# Altium PCB Power-PCB-Layout.PcbDoc
Units mil, origin at the board's own origin, x right, y up, seen from the top; angles counter-clockwise.
Board outline 3900 x 1515 mil, 2 copper layers (Top Layer, Bottom Layer), stack 61.811 mil thick; 60 components, 15 nets, 126 pads, 63 vias.
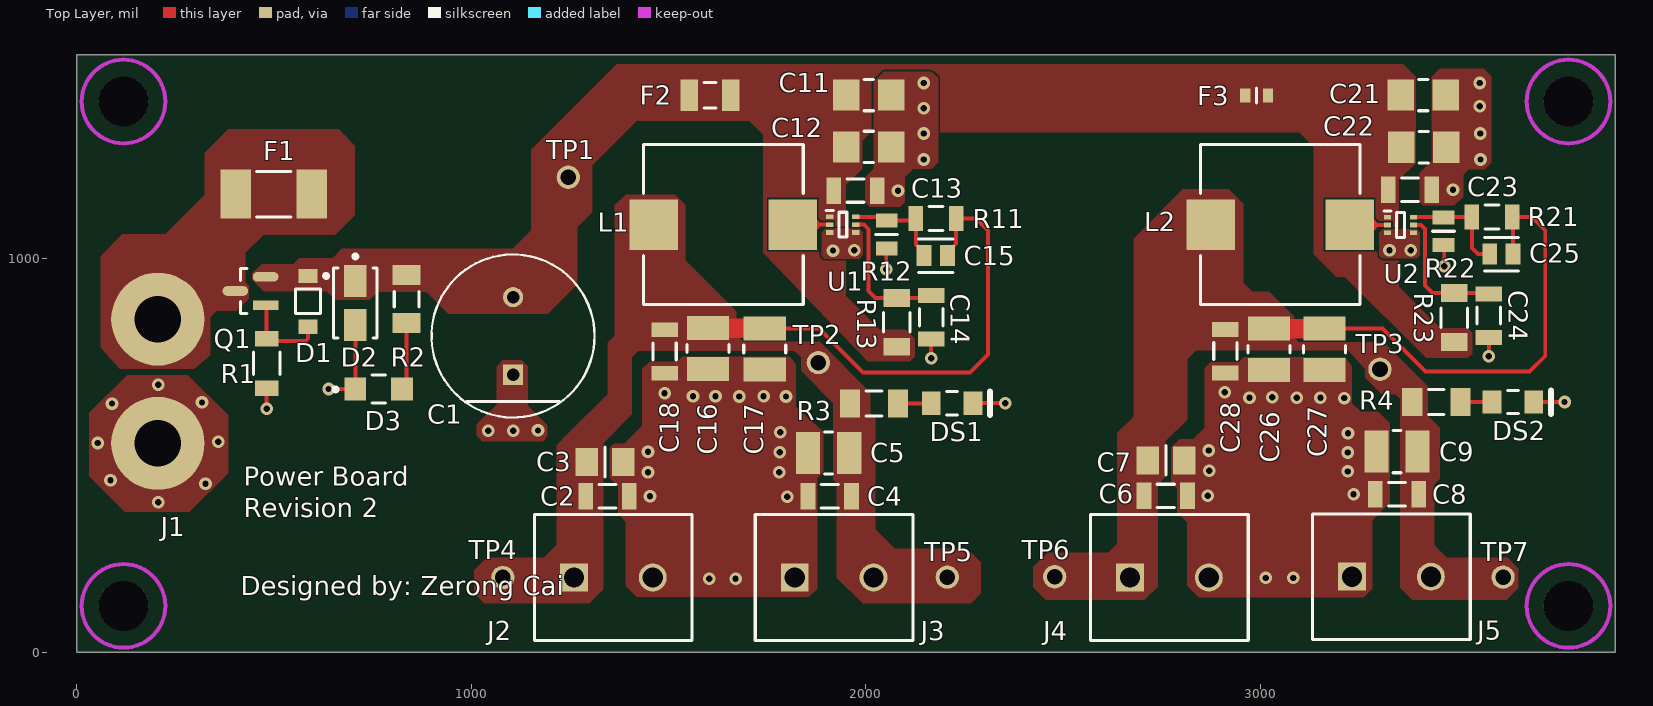
[diagram p0: Top Layer view]
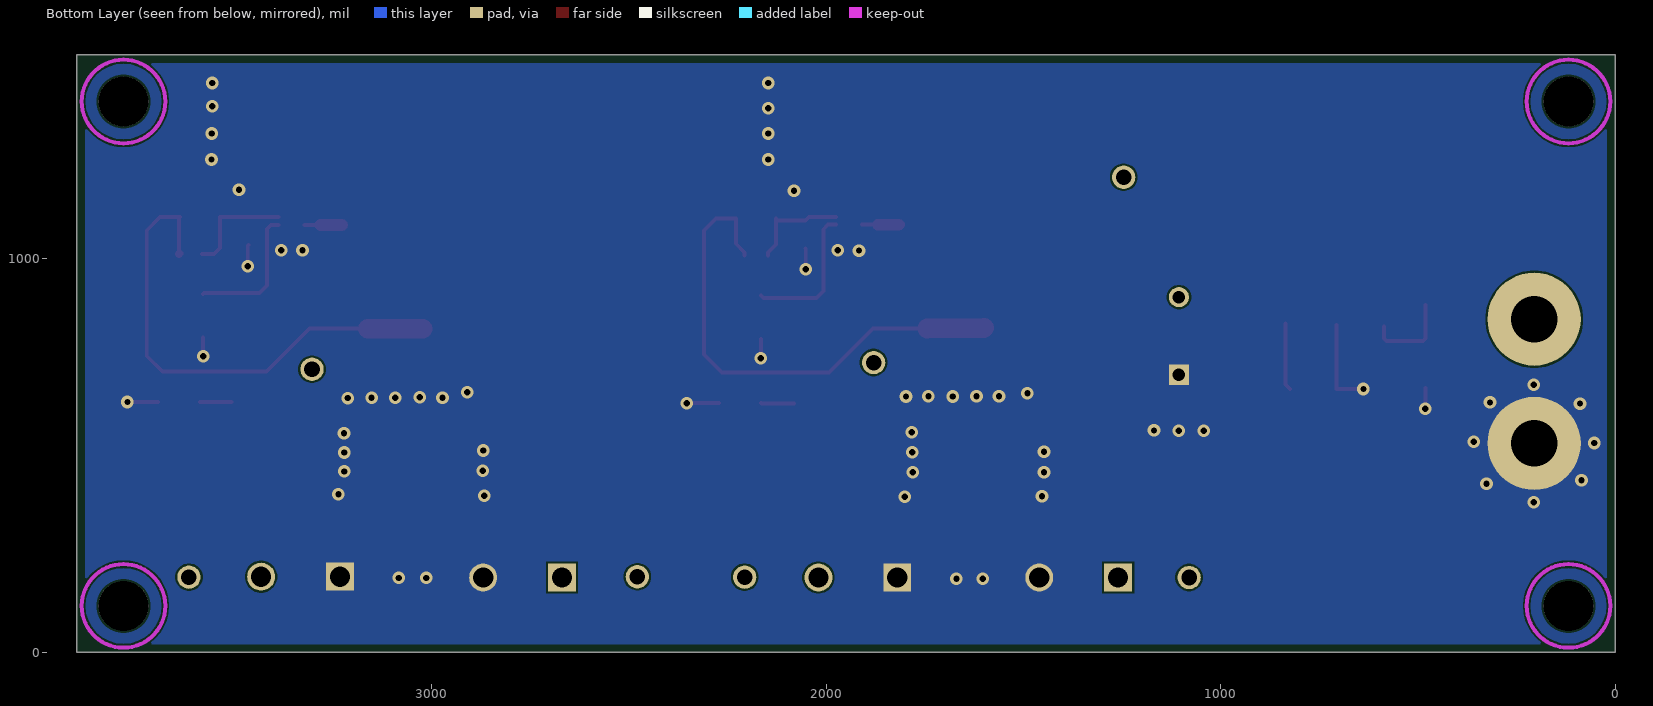
[diagram p1: Bottom Layer view, seen from below]
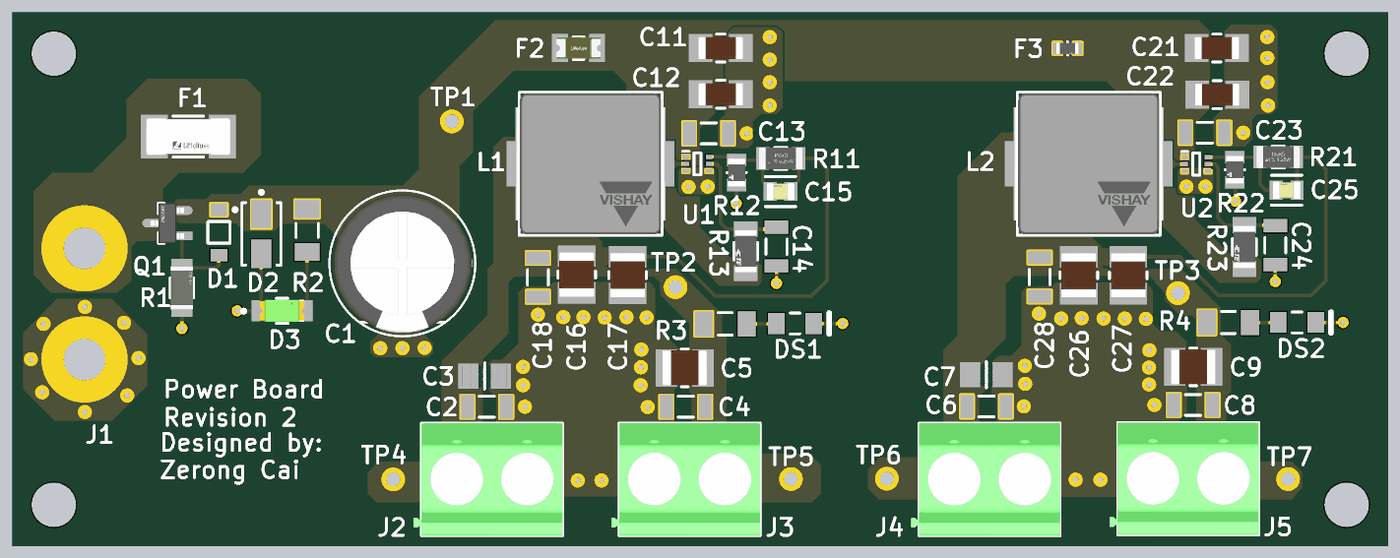
[diagram p2: 3D render of the assembled board from above, using the file's embedded part models]

## Layer stack, top to bottom
Top Solder: solder mask 0.394, Solder Resist, Dk 3.5
Top Layer: signal copper 1.378
Dielectric 1: dielectric 59.055, FR-4, Dk 4.8
Bottom Layer: signal copper 1.378
Bottom Solder: solder mask 0.394, Solder Resist, Dk 3.5

## Board outline
0,0 3900,0 3900,1515 0,1515

## Design rules (kind name [scope] priority, off if disabled: settings)
BoardOutlineClearance [All] p1: gap=20 ignorepadtopadclearanceinfootprint=FALSE except(0: Arc-SplitContinuation Track-SplitContinuation SMDPad-SplitContinuation THPad-SplitContinuation Via-SplitContinuation Fill-SplitContinuation Poly-SplitContinuation Region-SplitContinuation Text-SplitContinuation)
Clearance [All] p1: gap=5 ignorepadtopadclearanceinfootprint=FALSE except(0: Arc-Hole Track-Hole SMDPad-Hole THPad-Hole Via-Hole Fill-Hole Poly-Hole Region-Hole Text-Hole)
HoleSize [All] p1: absolutevalues=TRUE maxlimit=200 minlimit=1 maxpercent=80.000 minpercent=20.000
MinimumSolderMaskSliver [All] p1: minsoldermaskwidth=5
PolygonConnect [All] p1: connectstyle=Direct reliefconductorwidth=10 reliefentries=4 polygonreliefangle="90 Angle" airgapwidth=10
RoutingVias [All] p1: holewidth=12 width=24 viastyle="Through Hole" minholewidth=12 minwidth=24 maxholewidth=16 maxwidth=32
SilkToSolderMaskClearance [IsPad] p1: minsilkscreentomaskgap=5 clearancetoexposedcopper=TRUE
SolderMaskExpansion [All] p1: expansion=4 istentingtop=FALSE
Width [All] p1: maxlimit=100 minlimit=10 preferedwidth=10
27 further rules are at their usual default settings.

## Classes and differential pairs
component class Power: C11 C12 C13 C14 C15 C16 C17 C18 C21 C22 C23 C24 C25 C26 C27 C28 DS1 DS2 F2 F3 L1 L2 R3 R4 R11 R12 R13 R21 R22 R23 TP2 TP3 U1 U2
component class Input-Battery: C1 D1 D2 D3 F1 J1 Q1 R1 R2 TP1
component class Output-Connectors: C2 C3 C4 C5 C6 C7 C8 C9 J2 J3 J4 J5 TP4 TP5 TP6 TP7

## Components (designator, comment, footprint, x,y, rotation, side; value= is the part's Value field where it differs from the comment)
C1 "470u" FP-RAD-TH-D_10_0_5-L_12_5-MFG 1105.75,802.49 r90 top
C2 "100nF" CAPC1206(3216)170_L 1345,396 r180 top
C3 "10uf" FP-GCJ31C-0_3-IPC_C 1339,483 r0 top
C4 "100nF" CAPC1206(3216)170_L 1909,396 r0 top
C5 "47uF" FP-1210-L_3_2_0_3-W_2_5_0-IPC_B 1906,506 r180 top
C6 "100nF" CAPC1206(3216)170_L 2761,397 r180 top
C7 "10uf" FP-GCJ31C-0_3-IPC_C 2761,487 r0 top
C8 "100nF" CAPC1206(3216)170_L 3346.88,401 r0 top
C9 "47uF" FP-1210-L_3_2_0_3-W_2_5_0-IPC_B 3347,509 r180 top
C11 "22uF" FP-1206-L_3_2_0_3-W_1_6_0-IPC_A 2008,1413 r0 top
C12 "22uF" FP-1206-L_3_2_0_3-W_1_6_0-IPC_A 2008,1282 r0 top
C13 "100nF" CAPC1206(3216)170_L 1974,1171 r180 top
C14 "100nF" CAPC1206(3216)170_L 2166,850 r90 top
C15 "100pF" FP-C0805C-DN-MFG 2177.53,1006 r0 top value="100 pF"
C16 "47uF" FP-1210-L_3_2_0_3-W_2_5_0-IPC_B 1600,770.82 r270 top
C17 "47uF" FP-1210-L_3_2_0_3-W_2_5_0-IPC_B 1744,769.18 r270 top
C18 "100nF" CAPC1206(3216)170_L 1490,762.88 r90 top
C21 "22uF" FP-1206-L_3_2_0_3-W_1_6_0-IPC_A 3414,1413 r0 top
C22 "22uF" FP-1206-L_3_2_0_3-W_1_6_0-IPC_A 3415,1281 r0 top
C23 "100nF" CAPC1206(3216)170_L 3380,1173 r180 top
C24 "100nF" CAPC1206(3216)170_L 3580,854 r90 top
C25 "100pF" FP-C0805C-DN-MFG 3612,1010 r0 top value="100 pF"
C26 "47uF" FP-1210-L_3_2_0_3-W_2_5_0-IPC_B 3023,768.82 r270 top
C27 "47uF" FP-1210-L_3_2_0_3-W_2_5_0-IPC_B 3163,768.82 r270 top
C28 "100nF" CAPC1206(3216)170_L 2912,764 r90 top
D1 "MMSZ12T1G" ONSC-SOD-123-2-425-04_V 586,890.37 r270 top
D2 "SMAJ10A-E3/61" VISH-DO-214AC-2_L 706,886 r270 top
D3 "598-8270-107F" FP-598-8270-107F-MFG 765,668 r0 top
DS1 "SML-LX1206IC-TR" LUMX-SML-LX1206IC_V 2219,632 r0 top
DS2 "SML-LX1206IC-TR" LUMX-SML-LX1206IC_V 3641.15,635 r0 top
F1 "0452004.MRL" FP-0452-MFG 499,1162 r0 top value=0.0186Ω
F2 "0466003.NR" FP-0466-MFG 1605,1413 r0 top value=0.019Ω
F3 "ERB-RE2R00V" FP-ERBRE-MFG 2991,1412 r0 top
J1 "XT60" XT60-Footprint-1 205,530.04 r0 top
J2 "1729128" PHOE-1729128-2_V 1360,190 r0 top
J3 "1729128" PHOE-1729128-2_V 1920,190 r0 top
J4 "1729128" PHOE-1729128-2_V 2770,190 r0 top
J5 "1729128" PHOE-1729128-2_V 3333,192 r0 top
L1 "3.3uH" FP-IHLP-4040DZ-FP_3_124x3-MFG 1639,1085 r0 top
L2 "3.3uH" FP-IHLP-4040DZ-FP_3_124x3-MFG 3051,1085 r0 top
Q1 "DMP3099L-13" FP-SOT23-IPC_A 440,916.5 r180 top
R1 "10k" FP-AC1206-MFG 481,733.01 r90 top value=10KΩ
R2 "1k" RESC3216X60X45ML10T20 836,896 r270 top
R3 "1k" RESC3216X60X45ML10T20 2021,631 r0 top
R4 "1k" RESC3216X60X45ML10T20 3447.02,635 r0 top
R11 "220k" FP-CRGCQ1206-IPC_C 2178.22,1100 r0 top value=220KΩ
R12 "30k" FP-MCU0805-MFG 2053,1060 r270 top
R13 "100k" FP-RP732B-MFG 2079,837 r270 top value=100KΩ
R21 "220k" FP-CRGCQ1206-IPC_C 3588,1104 r0 top value=220KΩ
R22 "30k" FP-MCU0805-MFG 3465,1068 r270 top
R23 "100k" FP-RP732B-MFG 3492,849 r270 top value=100KΩ
TP1 "Test Point" "Test Point" 1246,1205 r270 top
TP2 "Test Point" "Test Point" 1880,735 r90 top
TP3 "Test Point" "Test Point" 3304,718 r90 top
TP4 "Test Point" "Test Point" 1080,190 r90 top
TP5 "Test Point" "Test Point" 2207,191 r90 top
TP6 "Test Point" "Test Point" 2479,192 r90 top
TP7 "Test Point" "Test Point" 3616,191 r90 top
U1 "TPS566247DRLR" SOTFL50P160X60-6N 1942.01,1084.68 r0 top
U2 "TPS566247DRLR" SOTFL50P160X60-6N 3356,1084 r0 top

## Footprints (in the part's own frame and the unit in brackets; to place one, negate y for a bottom-side part, rotate by r counter-clockwise, add the part's x,y. Pads: shape width x height; smd on the part's side, far side on the other; paste and mask are expansions set on the pad)
CAPC1206(3216)170_L [mm] "Chip Capacitor, Body 3.2x1.6mm, Height 1.7mm, IPC High Density"
  rect 0.95x1.7 smd: 1(-1.4,0) 2(1.4,0)
  silkscreen extent -0.55,-0.75 0.55,0.75, body extent -1.7,-0.9 1.7,0.9, height 1.7
FP-0452-MFG [mil]
  rect 77x124 smd paste+0 mask+0: 1(-96.5,0) 2(96.5,0)
  silkscreen extent -43,-58 43,58, body extent -139,-66 139,66, height 10
FP-0466-MFG [mil]
  rect 45x80 smd paste+0 mask+0: 1(-52.5,0) 2(52.5,0)
  silkscreen extent -15,-32 15,32, body extent -79,-44 79,44, height 10
FP-598-8270-107F-MFG [mm]
  rect 1.4x1.5 smd paste+0 mask+0: 1(-1.5,0) 2(1.5,0)
  silkscreen extent -2.9,-0.9 0.43,0.9, body extent -2.3,-1 2.3,1, height 0.25
FP-1206-L_3_2_0_3-W_1_6_0-IPC_A [mil]
  rect 67.06x78.9 smd paste+0 mask+0: 1(-57.1,0) 2(57.1,0)
  silkscreen extent -12,-39 12,39, body extent -110,-59 110,59, height 10
FP-1210-L_3_2_0_3-W_2_5_0-IPC_B [mil]
  rect 61.15x106.54 smd paste+0 mask+0: 1(-52.18,0) 2(52.18,0)
  silkscreen extent -10,-53 10,53, body extent -93,-63 93,63, height 10
FP-AC1206-MFG [mm]
  rect 1x1.5 smd paste+0 mask+0: 1(-1.6,0) 2(1.6,0)
  silkscreen extent -0.72,-0.85 0.72,0.85, body extent -2.2,-0.95 2.2,0.95, height 0.25
FP-C0805C-DN-MFG [mm]
  rect 0.95x1.35 smd paste+0 mask+0: 1(-0.75,0) 2(0.75,0)
  silkscreen extent -1.1,-1.07 1.1,1.07, body extent -1.4,-0.85 1.4,0.85, height 0.25
FP-CRGCQ1206-IPC_C [mil]
  rect 37.64x63.38 smd paste+0 mask+0: 1(-51.22,0) 2(51.22,0)
  silkscreen extent -18,-31 18,31, body extent -74,-37 74,37, height 10
FP-ERBRE-MFG [mm]
  rect 0.65x0.9 smd: 1(-0.725,0) 2(0.725,0)
  silkscreen extent 0,-0.48 0,0.48, body extent -1.15,-0.58 1.15,0.58, height 0.25
FP-GCJ31C-0_3-IPC_C [mil]
  rect 57.21x71.03 smd paste+0 mask+0: 1(-46.28,0) 2(46.28,0)
  silkscreen extent 0,-37 0,37, body extent -79,-41 79,41, height 10
FP-IHLP-4040DZ-FP_3_124x3-MFG [mil]
  rect 122.99x127.99 smd paste+0 mask+0: 1(-176,0) 2(176,0)
  silkscreen extent -202,-202 202,202, body extent -241,-206 241,206, height 10
FP-MCU0805-MFG [mm]
  rect 0.9x1.4 smd paste+0 mask+0: 1(-0.9,0) 2(0.9,0)
  silkscreen extent 0,-0.7 0,0.7, body extent -1.45,-0.8 1.45,0.8, height 0.25
FP-RAD-TH-D_10_0_5-L_12_5-MFG [mm]
  rect 1.3x1.3 hole 0.8 paste-2539.97 mask+0: 1(-2.5,0)
  round 1.3 hole 0.8 paste-2539.97 mask+0: 2(2.5,0)
  silkscreen extent -5.25,-5.25 5.25,5.25, body extent -5.35,-5.35 5.35,5.35, height 0.25
FP-RP732B-MFG [mm]
  rect 1.15x1.7 smd paste+0 mask+0: 1(-1.575,0) 2(1.575,0)
  silkscreen extent -0.63,-0.85 0.63,0.85, body extent -2.25,-0.95 2.25,0.95, height 0.25
FP-SOT23-IPC_A [mm]
  rect 1.659x0.627 smd paste+0 mask+0: 1(-0.977,0.915)
  rrect100% 1.659x0.627 smd paste+0 mask+0: 2(-0.977,-0.915) 3(0.977,0)
  silkscreen extent 0.23,-1.45 0.65,1.45, body extent -2.31,-1.95 2.31,1.95, height 0.25
LUMX-SML-LX1206IC_V [mm] "SMD, 2-Leads, Body 3.2x1.5mm"
  rect 1.2x1.5 smd: 1(-1.35,0) 2(1.35,0)
  silkscreen extent -0.35,-0.75 2.45,0.75, body extent -1.6,-0.8 1.6,0.8, height 1.1
ONSC-SOD-123-2-425-04_V [mm] "SOD, 2-Leads, Body 2.69x1.6mm"
  rect 0.91x1.22 smd: 1(-1.635,0) 2(1.635,0)
  silkscreen extent -1.76,-0.8 0.78,1.29, body extent -1.35,-0.8 1.35,0.8, height 1.35
PHOE-1729128-2_V [mm] "Receptacle, 2-Leads, Body 8.1x10.16mm, Pitch 5.08mm"
  rect 1.8x1.8 hole 1.3: 1(-2.54,0)
  round 1.8 hole 1.3: 2(2.54,0)
  silkscreen extent -5.08,-4.05 5.08,4.05, body extent -5.65,-4.05 5.08,4.05, height 10.01
RESC3216X60X45ML10T20 [mm] "Chip Resistor, 2-Leads, Body 3.20x1.60mm, IPC Low Density"
  rect 1.3x1.8 smd: 1(-1.55,0) 2(1.55,0)
  silkscreen extent -0.5,-0.8 0.5,0.8, body extent -1.65,-0.85 1.65,0.85, height 0.6
SOTFL50P160X60-6N [mm]
  rect 0.475x0.3 smd: 1(-0.838,0.5) 2(-0.838,0) 3(-0.838,-0.5) 4(0.838,-0.5) 5(0.838,0) 6(0.838,0.5)
  silkscreen extent -1.07,-0.8 0.25,0.9
"Test Point" [mm] "Test Point"
  round 1.5 hole 1: 1(0,0)
VISH-DO-214AC-2_L [mm] "DO-214AC, 2-Leads, Body 4.5x2.79mm, IPC High Density"
  rect 2.05x1.45 smd: 1(-1.425,0) 2(1.425,0)
  silkscreen extent -3.12,-1.4 2.25,1.4, body extent -2.25,-1.4 2.25,1.4, height 2.29
XT60-Footprint-1 [mm]
  round 6 hole 3: 1(0,8) 2(0,0)

## Part data
C1: library part CMP-05427-001980-1, "Aluminum Electrolytic Capacitors (Radial Lead Type) 470uF ±20% 16V", Capacitance=470uF, Case/Package=Radial, ESR (Equivalent Series Resistance)=38mR, Max Operating Temperature=105°C, Min Operating Temperature=-40°C, Package Quantity=500, Ripple Current=1.29A, Tolerance=20%, Voltage Rating=16V, Diameter=10mm, Height=12.5mm, Height - Seated (Max)=0.551inch, Impedance=38mR, Lead Diameter=0.6mm, Lead Free="Lead Free", Lead Pitch=5mm, Length=12.5mm, Life (Hours)=4000Hour, Mount="Through Hole", Packaging="Tape and Reel", Radiation Hardening=No, RoHS Compliant=Yes, Series=FM, Termination=Radial, Voltage Rating (DC)=16V
C2 C4 C6 C8 C13 C14 C18 C23 C24 C28: library part CMP-1037-04201-1, "CAP 100nF 50V ±10% 1206 (3216 Metric) Thickness 1.7mm SMD", Case-EIA=1206, Case-Metric=3216, Rated Voltage="50 V", Tolerance=Â±10%, Max Thickness="1.7 mm", Technology=SMT
C3 C7: library part CMP-06035-052008-1, "Cap Ceramic 10uF 10V X7R 10% Pad SMD 1206 Soft Termination  +125°C Automotive T/R", Capacitance=10uF, Case Code (Imperial)=1206, Case Code (Metric)=3216, Dielectric=X7R, Max Operating Temperature=125°C, Min Operating Temperature=-55°C, Package Quantity=2000, Ratings=AEC-Q200, Tolerance=10%, Voltage=10V, Case/Package=1206, Depth=1.6mm, Features="Soft Termination", Height=1.6mm, Lead Free="Lead Free", Length=3.2mm, Mount="Surface Mount", Packaging="Tape and Reel", Termination=SMD/SMT, Thickness=0.063inch, Voltage Rating=10V, Voltage Rating (DC)=10V, Width=0.063inch
C5 C9 C16 C17 C26 C27: library part CMP-14477-000081-1, "Capacitor Ceramic Multilayer 47uF 10% 10V X7R SMD 1210", Case/Package=1210, Max Operating Temperature=125°C, Min Operating Temperature=-55°C, Tolerance=10%, Voltage Rating=10V, Capacitance=47uF, Length=0.126inch, Mount="Surface Mount", Packaging="Tape and Reel", RoHS Compliant=Yes, Thickness=0.106inch, Width=0.098inch
C11 C12 C21 C22: library part CMP-14477-000099-2, "None", Case Code (Imperial)=1206, Case Code (Metric)=3216, Dielectric=X7R, Max Operating Temperature=125°C, Min Operating Temperature=-55°C, Tolerance=20%, Voltage Rating=16V, Capacitance=22uF, Case/Package=1206, Lead Free="Lead Free", Length=0.126inch, Mount="Surface Mount", Packaging="Tape and Reel", RoHS Compliant=Yes, Thickness=0.071inch, Width=0.063inch
C15 C25: library part CMP-2007-00229-2, "CAP CER 100PF 50V 10% X7R 0805 (used for feed-forward)", Capacitance="100 pF", Manufacturer=KEMET, Manufacturer Part Number=C0805C101K5RACTU, Package=C0805C-DN, Temperature="-55°C to +125°C", Temperature Characteristic=X7R, Temperature Coefficient=30ppm/°C, Temperature Range High=+125°C, Temperature Range Low=-55°C, Tolerance=0.1, Voltage Rating="50 V", Automotive=No, Category=Cap, ComponentLink2Description=Datasheet, ComponentLink2URL=https://content.kemet.com/datasheets/KEM_C1003_C0G_SMD.pdf, Device Class L1="Passive Components", Device Class L2=Capacitors, Device Class L3="Ceramic Capacitors", Digikey Description="CAP CER 100PF 50V 10% X7R 0805", Height=0.88mm, Ipc Land Pattern Name=CAPC200125X78, Lead Free=Yes, Material=Ceramic, Mouser Description="Cap Ceramic 100pF 50V X7R 10% Pad SMD 0805 125°C T/R", Octopart=https://octopart.com/c0805c101k5ractu-kemet-10441514, RoHS=TRUE
D1: library part CMP-1060-00269-1, "Zener Voltage Regulator, 500 mW, 2-Pin SOD-123, Pb-Free, Tape and Reel", Manufacturer="On Semiconductor", ComponentLink1Description="Manufacturer URL", ComponentLink1URL=http://www.onsemi.com/, ComponentLink2Description=Datasheet, ComponentLink2URL=http://www.onsemi.com/pub_link/Collateral/MMSZ2V4T1-D.PDF, ComponentLink3Description="Package Specification", ComponentLink3URL=http://www.onsemi.com/pub_link/Collateral/425-04.PDF, DatasheetVersion="Rev. 11", Mounting Technology="Surface Mount", P Max (W)=0.5, PackageDescription="2-Pin SOD, Body 1.6 x 2.69 mm", PackageReference=SOD-123-2-425-04, PackageVersion="Rev. G, 10/2009", Packing="Tape and Reel", PartNumber=MMSZ12T1G, RoHS=Pb-Free
D2: library part CMP-0548-00238-2, "Transient Voltage Suppressor, 6.40 to 231 V, 10 V Stand-off Voltage, Uni-Directional, -55 to 155 degC, 2-pin DO-214AC, Pb-Free, Tape and Reel", Manufacturer="Vishay Semiconductor", Operating Junction and Storage Temperature Range="-55 to 150 degC", ComponentLink1Description="Manufacturer URL", ComponentLink1URL=http://www.vishay.com/, ComponentLink2Description=Datasheet, ComponentLink2URL=http://www.vishay.com/docs/88390/smaj50a.pdf, ComponentLink3Description="Package Specification", ComponentLink3URL=http://www.vishay.com/docs/88390/smaj50a.pdf, DatasheetVersion=12/8/2013, ID (uA)=1, IFSM="40 A", Mounting Technology="Surface Mount", PackageDescription="2-Pin DO-214AC (SMA), Body 4.245 x 2.665 mm", PackageReference=DO-214AC-2, Packing="Tape and Reel", PartNumber=SMAJ10A-E3/61, PPPM (W)="400, 300", RoHS=TRUE, VBR Uni-Directional (V)="6.4 to 231", VWM (V)=10
D3: library part CMP-15384-000006-1, "SM LED 1206 ALINGAP G 7 REEL", Case Code (Imperial)=1206, Case Code (Metric)=3216, Color=Green, Forward Current=20mA, Forward Voltage=2V, Lens Color=Colorless, Max Operating Temperature=85°C, Min Operating Temperature=-30°C, Package Quantity=3000, Power Dissipation=60mW, Reverse Voltage=5V, Case/Package=1206, Depth=1.6mm, Dominant Wavelength=570nm, Height=0.7mm, Illumination Color=Green, Lead Free="Lead Free", Length=3.2mm, Lens Size=1.6mm, Lens Style=Flat, Lens Transparency=Clear, Luminous Intensity=20mcd, Mount="Surface Mount", Number of Elements=1, Number of LEDs=1, Number of Pins=2, Packaging="Tape and Reel", Radiation Hardening=No, REACH SVHC="No SVHC", RoHS Compliant=Yes, Series=598, Test Current=20mA, Viewing Angle=140°, Wavelength=570nm, Width=1.6mm
DS1 DS2: library part CMP-2000-07123-1, "LED Red, 65 mW, -40 to 85 degC, 2-Pin SMD, RoHS, Tape and Reel", Color=Red, Manufacturer=Lumex, Operating Temperature=-25to85C, Package Description="2-Pin Surface Mount Device, Body 3.2 x 1.5 mm", Package Reference=SML-LX1206IC, Reverse Voltage=5(Min)V, Supplier_Package=SMD, Datasheet URL=http://www.lumex.com/content/files/ProductAttachment/SML-LX1206IC-TR.pdf, Datasheet Version="Rev. J, 08/2012", Dimension=3.2x1.6x1.1mm, Dominant Wavelength=N/A, ECCN=EAR99, Family=SML-LX1206IC, HTS=8541402000, Intensity=6mcd, LED Material=GaAsP, Lens Appearance=ColorlessNonDiffused, Lens Dimensions=2x1.6x0.5mm, Manufacturer URL=http://www.lumexinstruments.com/, Mounting=SurfaceMount, Mounting Technology=SurfaceMount, Number of LEDs=1, Packaging=TapeandReel, Part No=SML-LX1206IC-TR, Peak Wavelength=635nm, Pin_Count=2, RoHS=Unknown, Supplier=Lumex, Supplier Standard Pack=3,000, Type=Uni-Color, Viewing Angle=160
F1: library part CMP-08605-000077-1, "FUSE BRD MNT 4A 125VAC/VDC 2SMD", Fuse Current=4A, Fuse Interrupt Ac Current=50A, Fuse Interrupt Dc Current=300A, Manufacturer="Littelfuse Inc", Max Fuse Ac Voltage=125V, Package=0452, Resistance=0.0186Ω, Temperature="-55°C to +125°C", Temperature Range High=+125°C, Temperature Range Low=-55°C, Automotive=No, Category=Fuse, ComponentLink2Description=Datasheet, ComponentLink2URL=https://www.littelfuse.com/~/media/electronics/datasheets/fuses/littelfuse_fuse_452_454_datasheet.pdf.pdf, Device Class L1="Circuit Protection", Device Class L2=Fuses, Device Class L3=unset, Digikey Description="FUSE BRD MNT 4A 125VAC/VDC 2SMD", Fuse Blow Speed=Slow, Fuse I2T=34.4A2Sec, Height=2.94mm, Lead Free=Yes, Manufacturer Part Number=0452004.MRL, Max Fuse Dc Voltage=125V, Mouser Description="Surface Mount Fuses 125V 4A", Octopart=https://octopart.com/0452004.mrl-littelfuse-566421, RoHS=TRUE, Voltage Rating=125V
F2: library part CMP-08605-000054-1, "FUSE BOARD MNT 3A 32VAC/VDC 1206", Fuse Current=3A, Fuse Interrupt Ac Current=50A, Fuse Voltage Drop=75.99mV, Manufacturer=Littelfuse, Max Fuse Ac Voltage=32V, Package=0466, Resistance=0.019Ω, Temperature="-55°C to +90°C", Temperature Range High=+90°C, Temperature Range Low=-55°C, Automotive=No, Category=Fuse, ComponentLink2Description=Datasheet, ComponentLink2URL=https://www.littelfuse.com/~/media/electronics/datasheets/fuses/littelfuse_fuse_466_datasheet.pdf.pdf, Device Class L1="Circuit Protection", Device Class L2=Fuses, Device Class L3=unset, Digikey Description="FUSE BOARD MNT 3A 32VAC/VDC 1206", Fuse Blow Speed=Fast, Fuse I2T=0.576A2Sec, Fuse Interrupt Dc Current=50A, Height=0.66mm, Lead Free=Yes, Manufacturer Part Number=0466003.NR, Max Fuse Dc Voltage=32V, Mouser Description="Surface Mount Fuses 32V 3A VFA Slimline", Octopart=https://octopart.com/0466003.nr-littelfuse-565175, RoHS=TRUE, Voltage Rating=32V
F3: library part CMP-00287-21220540-1, "ERB-RE2R00V Fuse Chip Fast Acting 2A 32V SMD Solder Pad 0603 1.6 X 0.8 X 0.54mm T/R UL/cUL", Case Code (Imperial)=0603, Case Code (Metric)=1608, Current=2A, Max Operating Temperature=125°C, Max Voltage Rating (DC)=32V, Min Operating Temperature=-40°C, Resistance=51mΩ, Approvals=UL, Body Material=Alumina, Case/Package=0603, Current Rating=2A, Depth=800µm, Fuse Current=2A, Height=640µm, Lead Free="Lead Free", Length=1.6mm, Lifecycle Status=Production, Mount="Surface Mount", Number of Pins=2, Packaging="Cut Tape", Radiation Hardening=No, REACH SVHC="No SVHC", RoHS=Compliant, Voltage Rating=32V, Voltage Rating (DC)=32V, Width=800µm
J1: library part CMP-002-00074-3, "Connector for Lipo Batteries with XT60 connectors"
J2 J3 J4 J5: library part CMP-2000-05815-1, "PCB Terminal Block, 13.5 A, 400 V, 2-Pin THD, RoHS, Bulk", Current Rating=13500mA, Manufacturer="Phoenix Contact", Package Description="2-Pin Through Hole Device, Body 8.1 x 10.16 mm, Pitch 5.08 mm", Package Reference=1729128-2, Package Version=03/2015, Voltage Rating=400V, Datasheet URL=https://datasheet.ciiva.com/16046/1729128-16046181.pdf, Datasheet Version=12/2013, Manufacturer URL=http://www.phoenixcontact.com/, Mounting Technology=ThroughHole, No. of Positions=2, No. of Rows=1, Orientation=Horizontal, Package URL=https://www.phoenixcontact.com/online/portal/pi/pxc/product_detail_page/!ut/p/b1/3VdJjqNKFDxLH8AFycySyWY2ozFsEPOMMQaDOX1XedGL_1Vdm5YXJleknhSKeBkvI6EA8ncAo3AYoDhBQGco6KN7VURTdemj9us_IEKEZo_YHiPAEWEFmDGOHMORkqKYCORBZxgL7ZoaZYcbFFUZ3fqxSY6GOuxydWUuHqz1ynmMFygu583Bob0Ewr6Sd_l-5m-kAueHiB0jpRwZwe58wwtkpxtMYd_LmGcDRU02dRNEyWt6Y2ti5pSyJ_reIkzIulrqApdnbT11V5jnCKbYNCvhEM1MCpPByat_X379-iThf08CI5GfOPqfBeS3BRoBOdD55AKVv0iLwCMq-2BrzXWSGRH7pUGD9uwXQjiph3xL0DKQwdGa0JImiIOmBNOestqgwTHSSs2oOep-78apyXQBvNi8ZLaFjvjWvcaUEBu0MC6Wbe-d6mB0FAebo2lUWinqYaZs5DAYzV0RP9yitUjnGJ0iI9xhZkT42OCQNUJJhkgWINNQLP2JFP6OpMg3JCVg70jqHT0lvKOnhHf0lPuOnnLf0VPuWx6_dxwUIvwk5WMkT0kLL1mh61l2yZVSzG3pYV_bqo-mj6uMKwKwdnnW8Jh5RTOJzMOA5c-eJDaZQw4mTMPH02PvS_ZAqNVjVTo2WyYLkwH_KU1mmmG5kjRhDqPXLwwVHvVOjCM60-fpXvTDfMGW1PVFVS1r4e4yVDk4ZdNbkUHvqPqQSeian4UD39fNKmachqdJ1NJbyk8rXT9mXTvPk3oE5meulKGgiruPJek-4I9hTT6G8ZLOyRSm2RRVbThERQad5OS28hdt4YW4vG0stgYYzsWsK4_7y6DZMjJSCqri1kyiZR5vD7pwIrNR7QwPHTcLTI5qT7eRlpHrdGiupYlqQDJ7zy_CND8fWWBoLRXxk1RVcXiBQwbTD4Xi7KL-FuO94t9xaqweXzH, Packing=Bulk, PartNumber=1729128, Pitch=5.08mm, RoHS=TRUE
L1 L2: library part CMP-02424-000263-1, "Commercial Inductors, High Saturation Series 3.3uH 10A 14.4mΩ 20%", Case Code (Imperial)=4040, Current Rating=10A, DC Resistance (DCR)=14.4mR, Inductance Tolerance=20%, Max DC Current=18.6A, Max Operating Temperature=125°C, Min Operating Temperature=-55°C, Package Quantity=500, Self Resonant Frequency=5MHz, Test Frequency=100kHz, Case/Package=4040, Contact Plating=Tin, Core Material=Metal, Depth=10.3mm, Height=4mm, Height - Seated (Max)=0.157inch, Inductance=3.3uH, Lead Free="Lead Free", Length=0.43inch, Military Standard=Not, Mount="Surface Mount", Number of Pins=4040, Packaging="Tape and Reel", Radiation Hardening=No, RMS Current (Irms)=10A, Saturation Current=18.6A, Shielding=Shielded, Termination=SMD/SMT, Tolerance=20%, Weight=0.070548oz, Width=0.405inch
Q1: library part CMP-12801-000102-1, "MOSFET P-CH 30V 3.8A SOT23", Case/Package=TO-236-3, Continuous Drain Current (ID)=3.8A, Drain to Source Resistance=65mR, Drain to Source Voltage (Vdss)=30V, Gate to Source Voltage (Vgs)=20V, Input Capacitance=563pF, Max Operating Temperature=150°C, Max Power Dissipation=1.08W, Min Operating Temperature=-55°C, Package Quantity=10000, Element Configuration=Single, Fall Time=15ns, Lead Free="Lead Free", Mount="Surface Mount", Number of Channels=1, Number of Pins=3, Packaging="Tape and Reel", Radiation Hardening=No, Rds On Max=65mR, REACH SVHC="No SVHC", Rise Time=5ns, Turn-Off Delay Time=31ns, Turn-On Delay Time=4.8ns, Weight=0.000282oz
R1: library part CMP-03412-020699-1, "AC1206 10KΩ 0.25W 1.00%", Manufacturer=Yageo, Manufacturer Part Number=AC1206FR-1310KL, Package=AC1206, Power Rating=0.25W, Resistance=10KΩ, Temperature="-55°C to +155°C", Temperature Range High=+155°C, Temperature Range Low=-55°C, Tolerance=0.01, Voltage Rating=200V, Automotive=Yes, Automotive Grade="Grade 0", Category=Res, ComponentLink2Description=Datasheet, ComponentLink2URL=http://www.yageo.com/NewPortal/yageodocoutput?fileName=/pdf/R-Chip/PYu-AC_51_RoHS_L_6.pdf, Composition="Thick Film", Device Class L1="Passive Components", Device Class L2=Resistors, Device Class L3="Chip SMD Resistors", Footprint Url=http://www.yageo.com/exep/pages/download/literatures/PYu-R_Mount_10.pdf, Height=0.65mm, Ipc Land Pattern Name=RESC310160X55, Lead Free=Yes, Octopart=https://octopart.com/ac1206fr-1310kl-yageo-74169507, RoHS=TRUE, Series=AC
R2 R3 R4: library part CMP-2003-01869-1, Manufacturer="Vishay Dale", Part Number=CRCW12061K00JNTA
R11 R21: library part CMP-03211-009600-1, "CRGCQ1206 220KΩ 0.25W 1% ±100ppm/°C 200V", Ambient Temperature Range High=+70°C, Manufacturer="TE Connectivity", Manufacturer Part Number=CRGCQ1206F220K, Package=CRGCQ1206, Power Rating=0.25W, Resistance=220KΩ, Temperature="-55°C to +155°C", Temperature Coefficient=±100ppm/°C, Temperature Range High=+155°C, Temperature Range Low=-55°C, Tolerance=0.01, Voltage Rating=200V, Automotive=Yes, Automotive Grade="Grade 1213", Category=Res, ComponentLink2Description=Datasheet, ComponentLink2URL=https://www.te.com/commerce/DocumentDelivery/DDEController?Action=showdoc&DocId=Data+Sheet%7F1773204-3%7F1%7Fpdf%7FEnglish%7FENG_DS_1773204-3_1.pdf%7F4-2176347-1222, Composition="Thick Film", Device Class L1="Passive Components", Device Class L2=Resistors, Device Class L3="Chip SMD Resistors", Height=0.65mm, Ipc Land Pattern Name=RESC310155X55, Lead Free=Yes, Octopart=https://octopart.com/crgcq1206f220k-te+connectivity-91018263, RoHS=TRUE, Series=CRGCQ
R12 R22: library part CMP-02407-001702-1, "Thin Film Resistors - SMD MCU 0805-50 1% P5 30K", Case/Package=0805, Max Operating Temperature=125°C, Min Operating Temperature=-55°C, Resistance=30kR, Temperature Coefficient=50ppm/°C, Tolerance=1%, Composition="Thin Film", Contact Plating=Tin, Height=450um, Lead Free="Lead Free", Length=2mm, Radiation Hardening=No, Width=1.25mm
R13 R23: library part CMP-03211-007900-1, "Res Thin Film 1206 100KΩ 0.1% 0.25W 15ppm/°C Molded SMD", Manufacturer="TE Connectivity", Manufacturer Part Number=RP73D2B100KBTG, Package=RP732B, Power Rating=0.25W, Resistance=100KΩ, Temperature="-55°C to 155°C", Temperature Coefficient=15ppm/°C, Temperature Range High=155°C, Temperature Range Low=-55°C, Tolerance=0.1%, Voltage Rating=200V, Automotive=No, Category=Res, ComponentLink2Description=Datasheet, ComponentLink2URL=https://www.te.com/commerce/DocumentDelivery/DDEController?Action=showdoc&DocId=Data+Sheet%7F1773272%7FL%7Fpdf%7FEnglish%7FENG_DS_1773272_L.pdf%7F8-1879255-6, Composition="Thin Film", Device Class L1="Passive Components", Device Class L2=Resistors, Device Class L3="Chip SMD Resistors", Height=0.65mm, Ipc Land Pattern Name=RESC305155X55, Lead Free=Yes, Octopart=https://octopart.com/rp73d2b100kbtg-te+connectivity-42012337, octopart_url=https://octopart.com/rp73d2b100kbtg-te+connectivity-42012337, Packaging="250 cut tape length", RoHS=TRUE, Series=RP73
TP1 TP2 TP3 TP4 TP5 TP6 TP7: library part CMP-00030-00006-7
U1 U2: library part CMP-012-000006-2, "Switching Voltage Regulators 3-V to 16-V input voltage, 6-A FCCM mode, synchronous buck converter in SOT-563 package", Manufacturer_Name="Texas Instruments", Mouser Part Number=595-TPS566247DRLR, Datasheet Link=https://www.ti.com/lit/ds/symlink/tps566247.pdf?ts=1660699623182&ref_url=https%253A%252F%252Fwww.ti.com%252Fproduct%252FTPS566247, Design Item ID=TPS566247DRLR, Geometry.Height=0.6mm, Manufacturer_Part_Number=TPS566247DRLR, Mouser Price/Stock=https://www.mouser.co.uk/ProductDetail/Texas-Instruments/TPS566247DRLR?qs=t7xnP681wgXvPlQds8kDLA%3D%3D, Source=TPS566247DRLR.SchLib

## Free pads (board coordinates)
  round 125.98 hole 125.98 unplated: MH1(118,1397) MH2(3782,1397) MH3(118,118) MH4(3782,118)

## Via types
v1: diameter 32, hole 16, Top Layer to Bottom Layer, 63 vias

## Nets (pads, with @x,y where several pads share a name; then routed paths per layer and width w, separated by ;. In a path a pad name is that pad's centre, name@x,y a point inside that pad or via, vN(x,y) a via of type N, cw(c..) or ccw(c..) an arc to the next point about the centre after c; other vN are vias at no path point)
+5V_BUCK1: C2.2 C3.1 C4.2 C5.1 C15.2 C16.1 C17.1 C18.2 J2.1 J3.2 L1.1 R3.1 R11.2 TP2.1 TP4.1 TP5.1 | length 1286.1
  Top Layer w10: C17.1 1881.63,821.37 1993,710 2264,710 2310,756 2310,1070 2280,1100 R11.2 2229.45,1036.27 2207.06,1013.87 C15.2
  Top Layer w50: C16.1 1600.82,822.18 1743.18,822.18 C17.1
+5V_BUCK2: C6.2 C7.1 C8.2 C9.1 C25.2 C26.1 C27.1 C28.2 J4.1 J5.2 L2.1 R4.1 R21.2 TP3.1 TP6.1 TP7.1 | length 1274.7
  Top Layer w10: C27.1 3310,821 3419,712 3683,712 3723,752 3723,1070 3689,1104 R21.2 3641.53,1101.7 C25.2
  Top Layer w20: C25.2@3639.99,1011.54 C25.2
  Top Layer w50: C26.1 C27.1
EN1: C14.2 R13.1 U1.5 | length 361.8
  Top Layer w10: U1.5 1995.32,1084.68 2007,1073 2007,917 2024.99,899.01 R13.1 2159.89,899.01 C14.2
EN2: C24.2 R23.1 U2.5 | length 347.8
  Top Layer w10: U2.5 3408,1084 3418,1074 3418,930 3436.99,911.01 R23.1 3578.11,911.01 C24.2
FB1: C15.1 R11.1 R12.1 U1.6 | length 260.3
  Top Layer w10: U1.6 2044.06,1104.37 R12.1 2122.43,1095.43 R11.1 2127,1034.87 2148,1013.87 C15.1
FB2: C25.1 R21.1 R22.1 U2.6 | length 278.9
  Top Layer w10: U2.6 3464.75,1103.68 R22.1 3465.57,1104 R21.1 3536.78,1025.22 3552,1010 C25.1
GND: C1.1 C2.1 C3.2 C4.1 C5.2 C6.1 C7.2 C8.1 C9.2 C11.2 C12.2 C13.1 C14.1 C16.2 C17.2 C18.1 C21.2 C22.2 C23.1 C24.1 C26.2 C27.2 C28.1 D2.2 D3.1 DS1.2 DS2.2 J1.2 J2.2 J3.1 J4.2 J5.1 R1.1 R12.2 R22.2 U1.3 U1.4 U2.3 U2.4 | length 645.5
  Top Layer w10: v1(481,618) R1.1 ; v1(638,668) D3.1 D2.2@705.94,829.84 ; v1(2052,972) 2052,1023.57 R12.2 ; v1(2166,746) C14.1 ; DS1.2 v1(2354,632) ; R22.2 3467,1030.57 v1(3467,979) ; v1(3580,751) C24.1 ; DS2.2 v1(3772,635)
  other v1: 1603,187 1670,187 3014,189 3084,189 206,381 1801,395 1453,396 2867,397 3237,401 326,428 85,437 1448,457 1781,457 3222,459 2871,461 3222,507 1782,508 1448,509 2870,512 53,531 358,534 3223,556 1783,558 1043,562 1106,562 1169,563 89,631 317,634 3213,645 2973,646 3093,646 3153,646 3031,647 1679,649 1798,649 1562,650 1619,650 1741,650 1490,657 2910,660 206,679 1917,1019 1971,1020 3328,1020 3382,1020 2082,1171 3489,1173 2147,1250 3559,1250 2147,1316 3558,1316 2147,1380 3557,1385 2147,1444 3557,1444
NetD1_2: D1.2 Q1.1 R1.2 | length 225.1
  Top Layer w10: Q1.1@481,881 R1.2 487,790 580.14,790 586,795.86 D1.2
NetD3_2: D3.2 R2.2 | length 171.1
  Top Layer w10: D3.2 835.43,679.37 R2.2@835.43,834.4
NetDS1_1: DS1.1 R3.2 | length 84.2
  Top Layer w10: R3.2 2164.85,631 DS1.1
NetDS2_1: DS2.1 R4.2 | length 80
  Top Layer w10: R4.2 DS2.1
SW1: L1.2 U1.2 | length 93.7
  Top Layer w10: L1.2@1869.68,1084.68 U1.2
  Top Layer w30: L1.2@1815.32,1084.68 L1.2@1869.68,1084.68
SW2: L2.2 U2.2 | length 95
  Top Layer w10: L2.2@3283.15,1084 U2.2
  Top Layer w30: L2.2@3228,1084 L2.2@3283.15,1084
VBATT: F1.1 F1.2 J1.1 Q1.3
VIN: C1.2 C11.1 C12.1 C13.2 C21.1 C22.1 C23.2 D1.1 D2.1 F2.1 F2.2 F3.1 F3.2 Q1.2 R2.1 R13.2 R23.2 TP1.1 U1.1 U2.1

## Polygon pours and split planes (outlines as drawn)
+5V_BUCK2 on Top Layer "NONET_L-01_P-001" (solid, pour order 73): 2957,1138 2921,1174 2804,1174 2679,1049 2679,598 2638,557 2638,276 2615,253 2461,253 2425,217 2425,165 2457,133 2706,133 2740,167 2740,425 2760,445 2760,535 2815,590 2815,743 2838,766 3224.11,766 3267,717.75 3267,697 3309,655 3343,655 3355,643 3355,574 3355,164 3386,133 3625.86,133 3655,164.38 3655,211.83 3628,240 3473,240 3441,272 3441,426 3455,440 3455,570 3425,600 3425,675 3313,787 3098,787 3087,798 3087,851 3023,915 2980,915 2957,938
+5V_BUCK1 on Top Layer "NONET_L-01_P-001" (solid, pour order 118): 1517.05,1160.95 1390.95,1160.95 1364,1134 1364,803 1346,785 1346,655 1245,554 1217,526 1217,273 1184,240 1039,240 1008,209 1008,150 1033,125 1299,125 1334,160 1334,531 1407,604 1407,749 1423,765 1819,765 1836,748 1836,714 1918,632 1918,438 1926,430 1926,280 1926,189.35 1991.94,125 2267,125 2292,150 2292,229 2258,263 2073,263 2024,312 2024,441 2024,595 2012,607 2012,659 1883,788 1689,788 1672,805 1672,865 1543,994 1543,1135
VIN on Top Layer "NONET_L-01_P-001" (solid, pour order 114): 445,961 468,984 548,984 564,1000 649,1000 672,1023 1105,1023 1152,1070 1152,1275 1369,1492 3363,1492 3395,1460 3395,1241 3352,1198 3352,927 3457,822 3527,822 3538,811 3538,758 3527,747 3421,747 3215,953 3193,953 3136,1010 3136,1282 3099,1319 2013,1319 1991,1297 1991,1227 1949,1185 1949,904 2035,818 2102,818 2124,796 2124,750 2112,738 2005.17,738 1740,1013.95 1740,1313 1705,1348 1419,1348 1306,1235 1306,1116 1268,1078 1268,933 1194,859 941,859 886,914 763,914 743,894 656,894 634,916 474,916 445,945
VBATT on Top Layer "NONET_L-01_P-001" (solid, pour order 117): 108.67,719 60,772 60,1005 115,1060 224,1060 324,1160 324,1267 383,1326 664,1326 705,1285 705,1109 655,1059 473,1059 427,1013 427,939 436,930 436,897 405,866 354,866 338,850 338,753 297.32,719
GND on Top Layer "NONET_L-01_P-001" (solid, pour order 63): 1807.25,750 1535,750 1522,737 1452,737 1434,719 1434,575 1388,529 1361,529 1351,519 1351,443 1372,422 1372,352 1392,332 1392,169 1420,141 1856,141 1877,162 1877,442 1892,457 1892,559.5 1822,622.5 1822,730.33
GND on Top Layer "NONET_L-01_P-001" (solid, pour order 49): 3216.5,748 2958,748 2947.2,737.2 2873,736 2860,720.65 2860,570 2831,541 2796,541 2775,520 2775,430 2790,415 2790,355 2815,330 2815,169 2844,140 3263,140 3285,162 3285,335 3329,379 3329,581 3300,610 3255,610 3233,632 3233,726
GND on Top Layer "NONET_L-01_P-001" (solid, pour order 39): 3586,1460.82 3566.82,1480 3455,1480 3435,1460 3435,1246.08 3405,1216.08 3405,1143 3414,1134 3492.92,1134 3515,1156.08 3515,1211.08 3528.92,1225 3569,1225 3586,1242
GND on Top Layer "NONET_L-01_P-001" (solid, pour order 60): 1899,1075 1888,1064 1888,1006 1896,998 1983,998 1993,1008 1993,1064.29 1983.62,1075
GND on Top Layer "NONET_L-01_P-001" (solid, pour order 44): 3311,1073 3302.25,1064.25 3302.25,1005.75 3309,999 3397,999 3404.75,1006.75 3404.75,1065.25 3397,1073
GND on Top Layer "NONET_L-01_P-001" (solid, pour order 8): 127,703 31.5,607.5 31.5,446.5 121,357 285,357 383,455 383,601 281,703
GND on Top Layer "NONET_L-01_P-001" (solid, pour order 11): 2165,1473 2046,1473 2020,1447 2020,1226 1999,1205 1999,1141 2010,1130 2088,1130 2099,1141 2099,1205 2120,1226 2167,1226 2184,1243 2184,1458
GND on Top Layer "NONET_L-01_P-001" (solid, pour order 9): 1080,741 1064,725 1064,628 1014,578 1014,550 1028,536 1181,536 1193,548 1193,576 1143,626 1143,726 1128,741
GND on Bottom Layer "NONET_L-01_P-001" (solid, pour order 116): 0,1515 0,0 3900,0 3900,1515

## Keep-outs
Keep-Out Layer:
  circle w10: c3782,1397 r106
  circle w10: c3782,118 r106
  circle w10: c118,118 r106
  circle w10: c118,1397 r106

## Other copper
Top Layer:
  pour cut-out: 3337.36,1094.91 3301.95,1094.91 3301.24,1094.2 3293.73,1101.71 3293.5,1101.71 3293.5,1154 3160.51,1154 3160.51,1016 3293.5,1016 3293.5,1055.5 3311,1073 3337.36,1073
  pour cut-out: 1923.37,1095.59 1886.64,1095.59 1886.24,1095.2 1881.5,1099.94 1881.5,1154 1748.5,1154 1748.5,1016 1881.5,1016 1881.5,1057.5 1897.78,1073.78 1923.37,1073.78

## Silkscreen, mask and mechanical layers (free items; w line width, h text height)
Top Overlay:
  text "Power Board" at 423,423 h48
  text "Revision 2" at 423,343 h48
  text "Designed by: Zerong Cai" at 415,145 h48
Mechanical 1:
  the board outline again, w10